# EAGLE board eagle_non_finite_coordinate (EAGLE 9.6.2)

No outline drawn. Coordinates in mm, seen from the top.
Copper layers used: 

## Footprints (pad centres in the part's own frame; a part is rotated, then mirrored left to right if it is on the bottom)
R0603 = smd 0.9 x 0.95: 1 -0.8,0; 2 0.8,0

## Placement (x,y rotation side)
R1  10k  [R0603]  nan,10 0 top

## Library data of the parts
R1 = rcl

## Nets
GND: R1.1